# EAGLE board sensor (EAGLE 9.6.2)
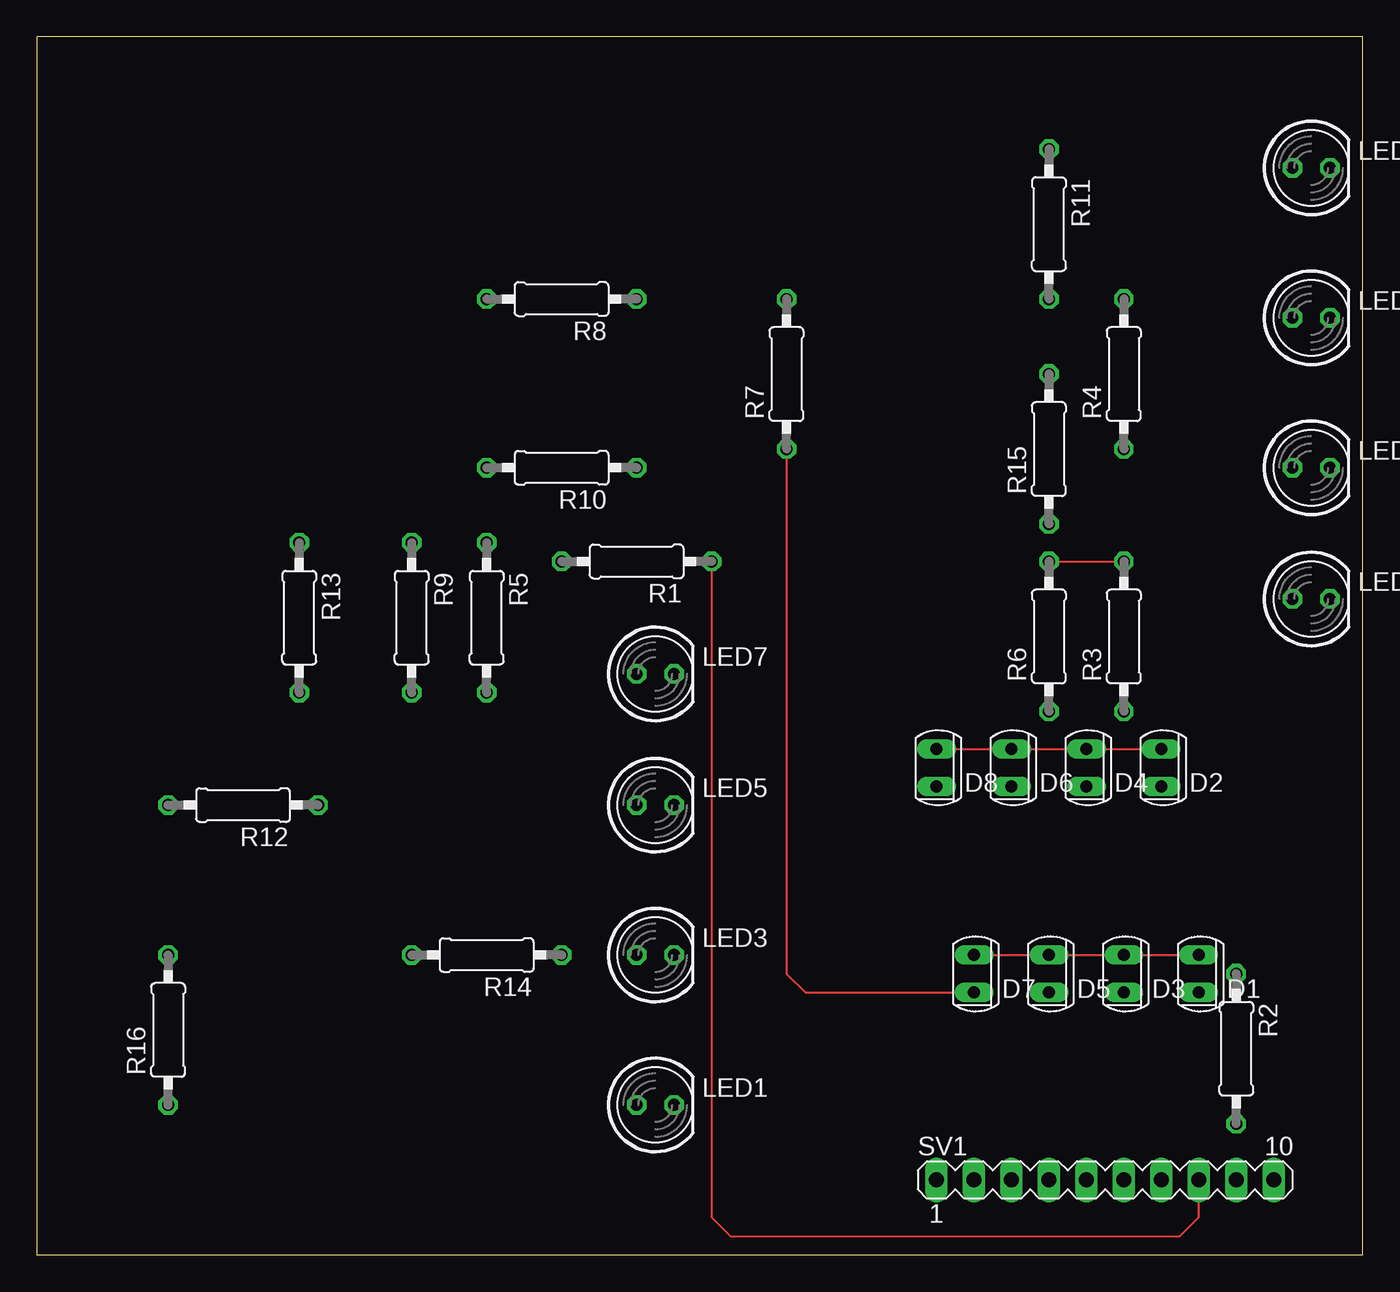
[diagram p0: board, top side]
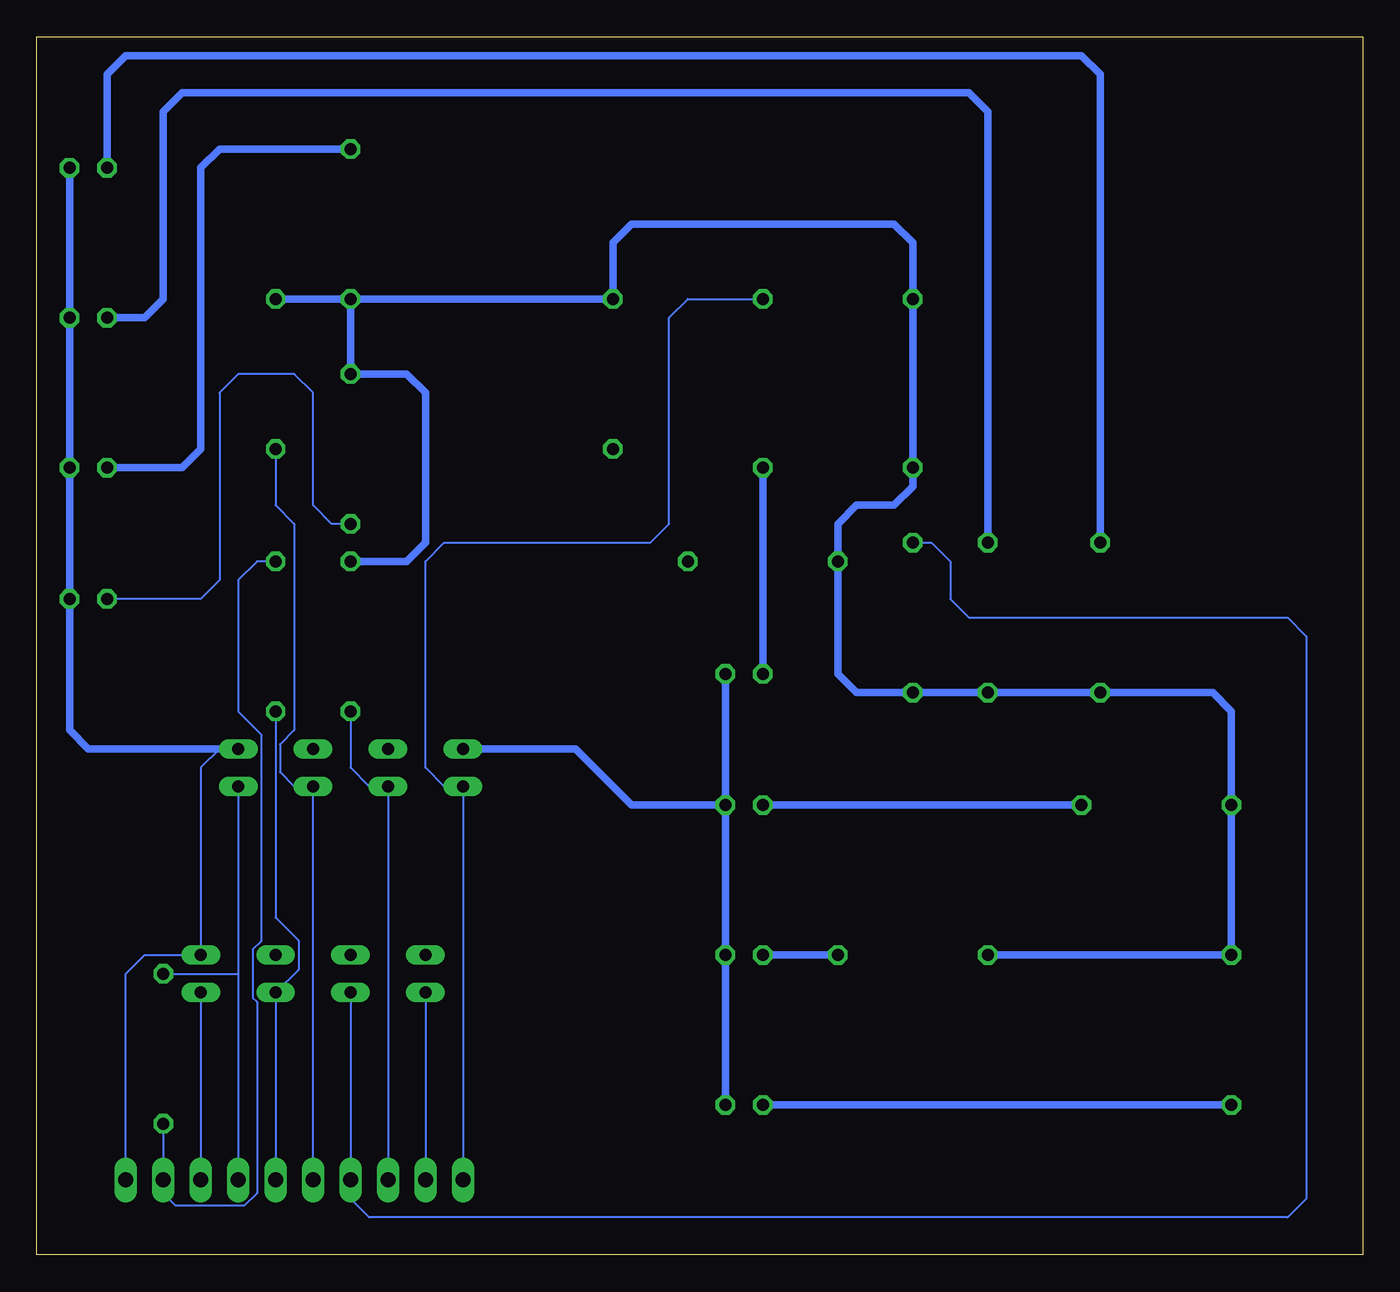
[diagram p1: board, bottom side, seen from below]

Size 89.84 x 82.54 mm. Coordinates in mm from the lower left corner, seen from the top.
Outline: 0,0 89.84,0 89.84,82.54 0,82.54 0,0
Copper layers (1*16): Top 0.035mm / dielectric 1.5mm / Bottom 0.035mm
Design rules "default": minimum track width 6mil, minimum drill 0.35mm, track to track 6mil, track to pad 6mil, pad to pad 6mil, via to via 6mil, smd to smd 6mil, copper to edge 40mil, drill to drill 6mil, minimum pad ring 10mil, minimum via ring 8mil, stop-mask expansion 4mil, vias tented up to drill 0mil, thermal gap 10mil

## Footprints (pad centres in the part's own frame; a part is rotated, then mirrored left to right if it is on the bottom)
SFH225 = drill 0.813 long: A 0,1.27; K 0,-1.27
LED5MM = drill 0.813 octagon: A -1.27,0; K 1.27,0
0207/10 = drill 0.813 octagon: 1 -5.08,0; 2 5.08,0
MA10-1 = drill 1.016 long: 1 -11.43,0; 2 -8.89,0; 3 -6.35,0; 4 -3.81,0; 5 -1.27,0; 6 1.27,0; 7 3.81,0; 8 6.35,0; 9 8.89,0; 10 11.43,0

## Placement (x,y rotation side)
D1  PhotoDioda  [SFH225]  78.74,19.05 0 top
D2  PhotoDioda  [SFH225]  76.2,33.02 0 top
D3  PhotoDioda  [SFH225]  73.66,19.05 0 top
D4  PhotoDioda  [SFH225]  71.12,33.02 0 top
D5  PhotoDioda  [SFH225]  68.58,19.05 0 top
D6  PhotoDioda  [SFH225]  66.04,33.02 0 top
D7  PhotoDioda  [SFH225]  63.5,19.05 0 top
D8  PhotoDioda  [SFH225]  60.96,33.02 0 top
LED1  LED putih SB  [LED5MM]  41.91,10.16 0 top
LED2  LED putih SB  [LED5MM]  86.36,44.45 0 top
LED3  LED putih SB  [LED5MM]  41.91,20.32 0 top
LED4  LED putih SB  [LED5MM]  86.36,73.66 0 top
LED5  LED putih SB  [LED5MM]  41.91,30.48 0 top
LED6  LED putih SB  [LED5MM]  86.36,53.34 0 top
LED7  LED putih SB  [LED5MM]  41.91,39.37 0 top
LED8  LED putih SB  [LED5MM]  86.36,63.5 0 top
R1  [0207/10]  40.64,46.99 180 top
R2  [0207/10]  81.28,13.97 270 top
R3  [0207/10]  73.66,41.91 90 top
R4  [0207/10]  73.66,59.69 90 top
R5  [0207/10]  30.48,43.18 270 top
R6  [0207/10]  68.58,41.91 90 top
R7  [0207/10]  50.8,59.69 90 top
R8  [0207/10]  35.56,64.77 180 top
R9  330  [0207/10]  25.4,43.18 270 top
R10  330  [0207/10]  35.56,53.34 180 top
R11  330  [0207/10]  68.58,69.85 270 top
R12  330  [0207/10]  13.97,30.48 180 top
R13  330  [0207/10]  17.78,43.18 270 top
R14  330  [0207/10]  30.48,20.32 180 top
R15  330  [0207/10]  68.58,54.61 90 top
R16  330  [0207/10]  8.89,15.24 90 top
SV1  [MA10-1]  72.39,5.08 0 top

## Library data of the parts
D1-D8 = opto-trans-siemens
LED1-LED8 = led
R1-R16 = resistor
SV1 = con-lstb

## Nets
GND: D1.A D2.A D3.A D4.A D5.A D6.A D7.A D8.A LED1.K LED2.K LED3.K LED4.K LED5.K LED6.K LED7.K LED8.K SV1.10
N$1: LED7.A R10.1
N$2: D7.K R7.1 SV1.2
N$3: D8.K R8.1 SV1.1
N$4: D1.K R1.1 SV1.8
N$5: D2.K R2.1 SV1.7
N$6: D3.K R3.1 SV1.6
N$7: D5.K R5.1 SV1.4
N$8: D4.K R4.1 SV1.5
N$9: D6.K R6.1 SV1.3
N$10: LED6.A R11.1
N$11: LED5.A R12.1
N$12: LED4.A R13.1
N$13: LED3.A R14.1
N$14: LED2.A R15.1
N$15: LED1.A R16.1
N$16: LED8.A R9.1
VCC: R1.2 R2.2 R3.2 R4.2 R5.2 R6.2 R7.2 R8.2 R9.2 R10.2 R11.2 R12.2 R13.2 R14.2 R15.2 R16.2 SV1.9

## Tracks (layer width: path | path; a pad name or v marks a point on that pad's centre or on a via)
GND
  Top 0.152: D7.A D5.A D3.A D1.A | D8.A D6.A D4.A D2.A
  Bottom 0.152: D2.A 77.47,34.29 78.74,33.02 D1.A 82.55,20.32 83.82,19.05 SV1.10
  Bottom 0.508: D2.A 86.36,34.29 87.63,35.56 LED2.K LED6.K LED8.K LED4.K | LED7.K LED5.K | LED5.K LED3.K LED1.K | D8.A 53.34,34.29 49.53,30.48 LED5.K
N$1
  Bottom 0.508: LED7.A R10.1
N$2
  Top 0.152: R7.1 50.8,19.05 52.07,17.78 D7.K
  Bottom 0.152: D7.K SV1.2
N$3
  Bottom 0.152: SV1.1 D8.K 62.23,31.75 63.5,33.02 63.5,46.99 62.23,48.26 48.26,48.26 46.99,49.53 46.99,63.5 45.72,64.77 R8.1
N$4
  Top 0.152: SV1.8 78.74,2.54 77.47,1.27 46.99,1.27 45.72,2.54 R1.1
  Bottom 0.152: D1.K SV1.8
N$5
  Bottom 0.152: D2.K 76.2,19.05 | 76.2,19.05 SV1.7 | R2.1 76.2,19.05
N$6
  Bottom 0.152: SV1.6 D3.K 72.11,19.33 72.11,21.31 73.66,22.86 R3.1
N$7
  Bottom 0.152: D5.K SV1.4 68.58,3.81 67.31,2.54 5.08,2.54 3.81,3.81 3.81,41.91 5.08,43.18 26.67,43.18 27.94,44.45 27.94,46.99 29.21,48.26 R5.1
N$8
  Bottom 0.152: SV1.5 D4.K 72.39,31.75 73.36,32.72 73.36,34.59 72.39,35.56 72.39,49.53 73.66,50.8 R4.1
N$9
  Bottom 0.152: SV1.3 D6.K 67.31,31.75 68.58,33.02 R6.1
N$10
  Bottom 0.508: R11.1 77.47,74.93 78.74,73.66 78.74,54.61 80.01,53.34 LED6.A
N$11
  Bottom 0.508: R12.1 LED5.A
N$12
  Bottom 0.508: LED4.A 85.09,80.01 83.83,81.27 19.05,81.27 17.78,80 R13.1
N$13
  Bottom 0.508: LED3.A R14.1
N$14
  Bottom 0.152: R15.1 69.85,49.53 71.12,50.8 71.12,58.42 72.39,59.69 76.2,59.69 77.47,58.42 77.47,45.72 78.74,44.45 LED2.A
N$15
  Bottom 0.508: R16.1 LED1.A
N$16
  Bottom 0.508: R9.1 25.4,77.47 26.67,78.74 80.01,78.74 81.28,77.47 81.28,64.77 82.55,63.5 LED8.A
VCC
  Top 0.152: R6.2 R3.2
  Bottom 0.152: R2.2 SV1.9 81.28,4.19 80.42,3.33 75.79,3.33 74.93,4.19 74.93,17.13 75.21,17.41 75.21,20.69 74.65,21.25 74.65,35.28 76.2,36.83 76.2,45.72 74.93,46.99 R3.2
  Bottom 0.508: R14.2 R16.2 R12.2 8.89,36.83 10.16,38.1 R13.2 R9.2 R5.2 34.29,38.1 35.56,39.37 R1.2 35.56,49.53 34.29,50.8 31.75,50.8 30.48,52.07 R10.2 R8.2 30.48,68.58 31.75,69.85 49.53,69.85 50.8,68.58 R7.2 R11.2 | R11.2 R4.2 | R11.2 R15.2 64.77,59.69 63.5,58.42 63.5,48.26 64.77,46.99 R6.2